# Altium PCB main_pwr.PcbDoc
Units mil, origin at the board's own origin, x right, y up, seen from the top; angles counter-clockwise.
Board outline 1300 x 1300 mil, 2 copper layers (Top Layer, Bottom Layer); 12 components, 7 nets, 48 pads, 13 vias.
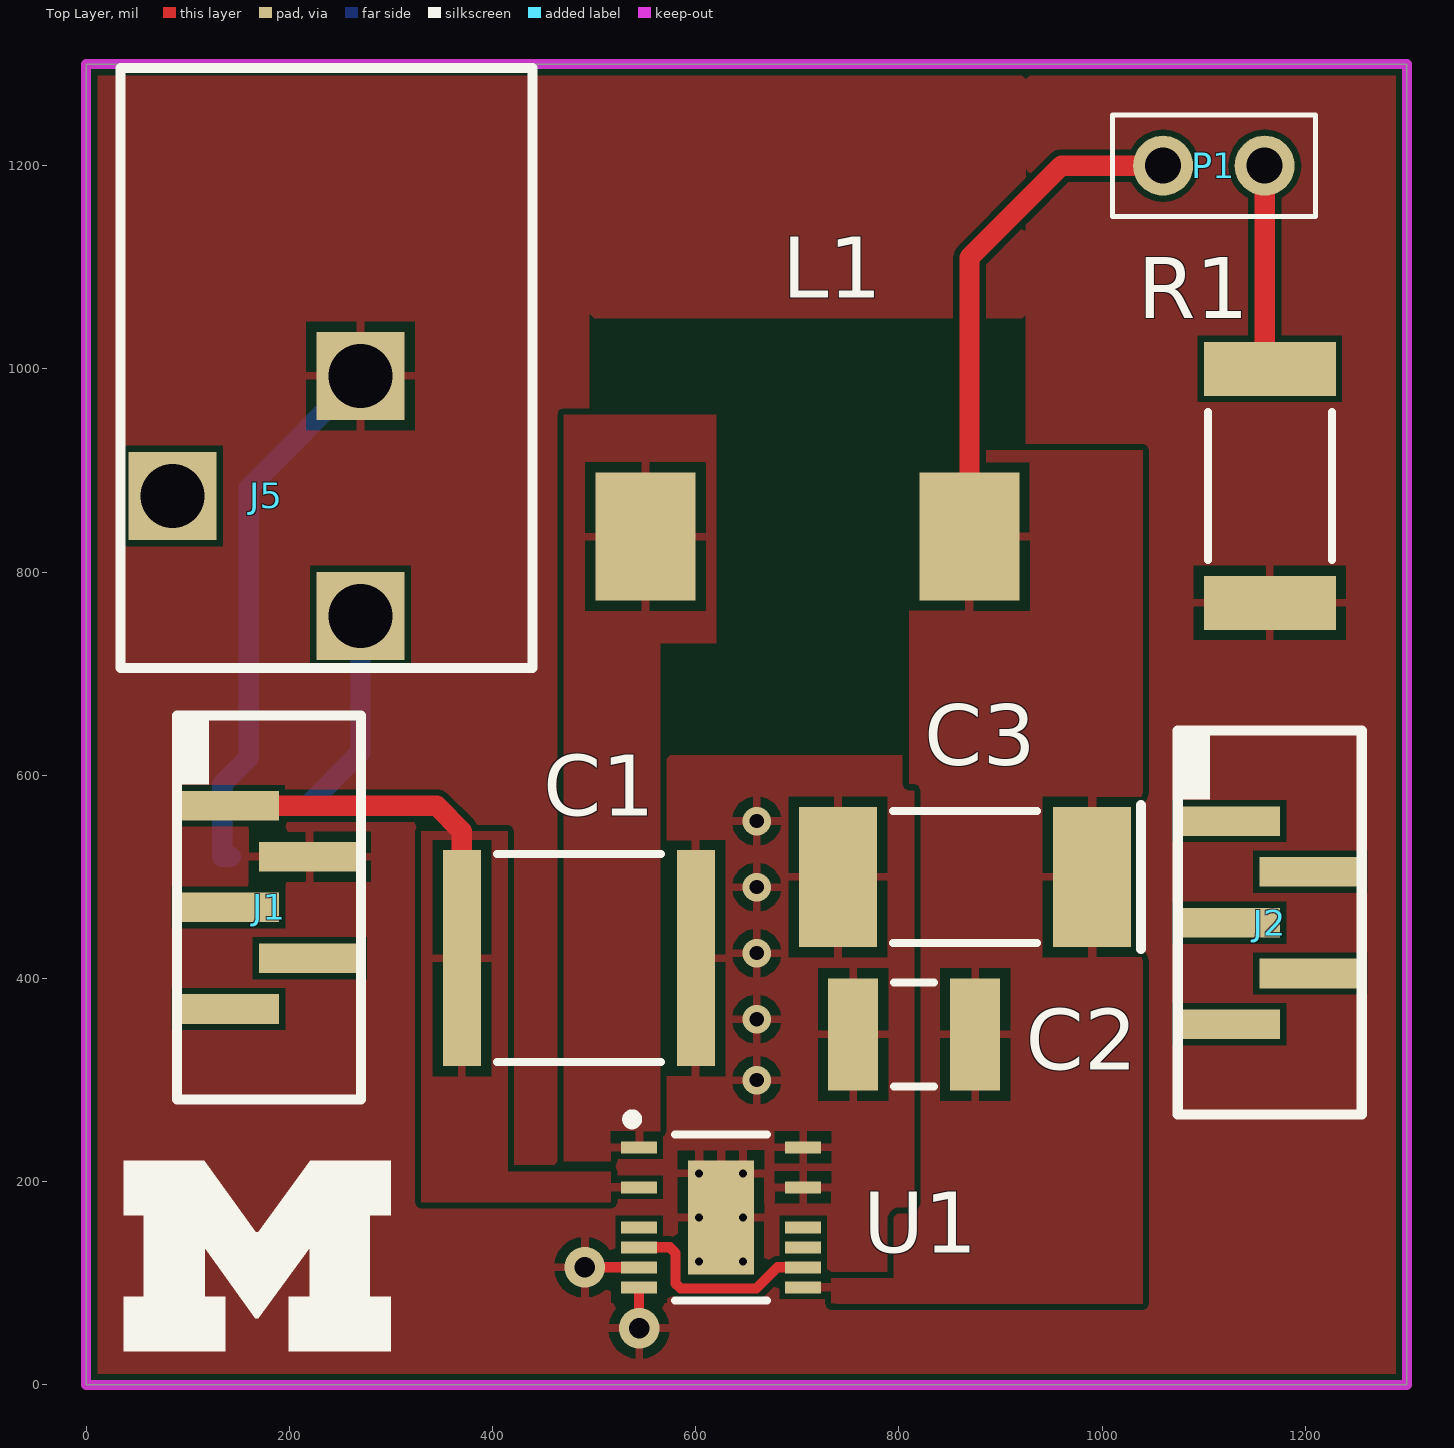
[diagram p0: Top Layer view]
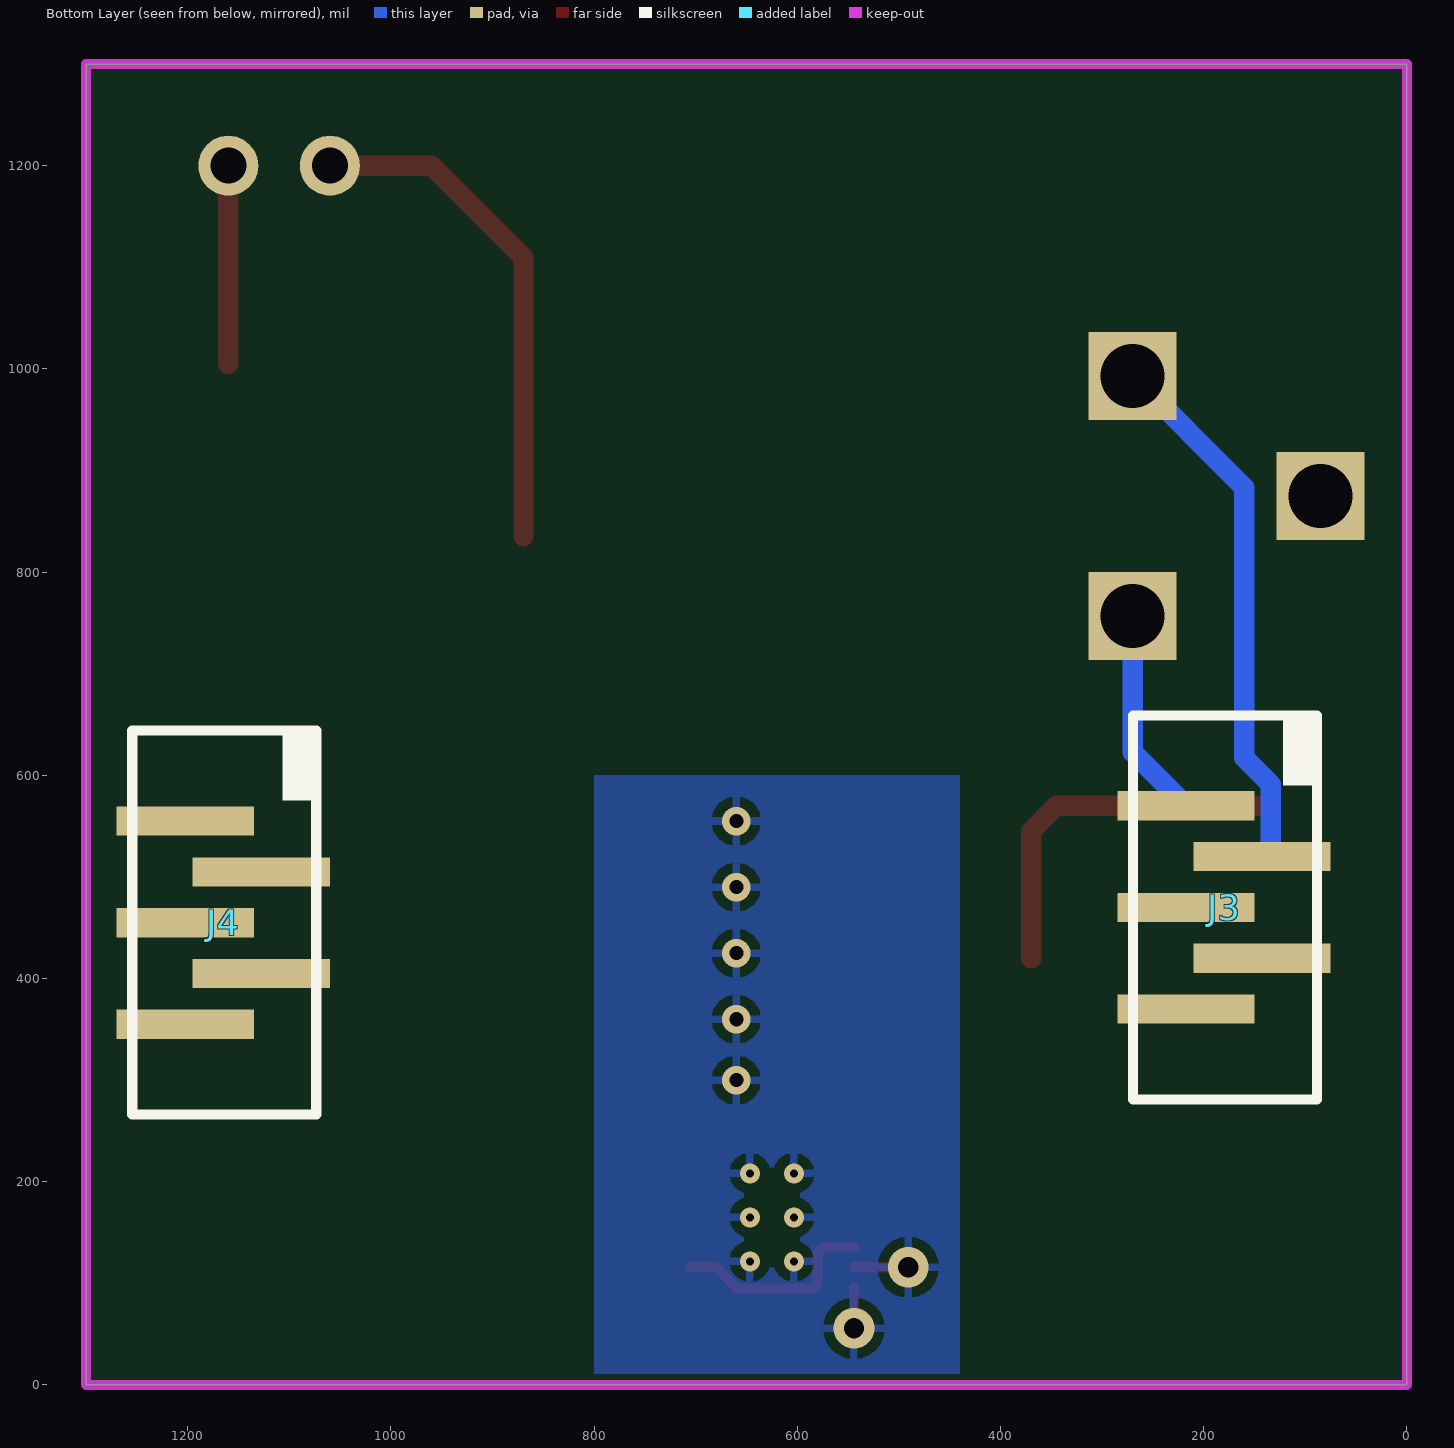
[diagram p1: Bottom Layer view, seen from below]

## Layer stack, top to bottom
Top Solder: solder mask 0.4, Solder Resist, Dk 3.5
Top Layer: signal copper 1.4
Dielectric 1: dielectric 12.6, FR-4, Dk 4.8
Bottom Layer: signal copper 1.4
Bottom Solder: solder mask 0.4, Solder Resist, Dk 3.5

## Board outline
0,0 0,1300 1300,1300 1300,0

## Design rules (kind name [scope] priority, off if disabled: settings)
Clearance "Clearance~Sunstone Circuits" [All] p1: gap=6 // Sunstone Circuits Minimum Clearance Rule (Double Sided)
HoleSize "HoleSize~Sunstone Circuits" [All] p1: absolutevalues=TRUE maxlimit=251 minlimit=16 maxpercent=80.000 minpercent=20.000 // SSC Hole Size Rule For Single Sided & Double Sided Designs.
HoleSize Testpoint [All] p2: absolutevalues=TRUE maxlimit=100 minlimit=1 maxpercent=80.000 minpercent=20.000
HoleSize TestPointUsage [All] p3: absolutevalues=TRUE maxlimit=100 minlimit=1 maxpercent=80.000 minpercent=20.000
MinimumAnnularRing "MinimumAnnularRing~Sunstone Circuits" [All] p1: minimumring=7 // Sunstone Circuits Minimum Annular Ring (Double Sided)
PlaneClearance "PlaneClearance~Sunstone Circuits" [All] p1: clearance=12 // Sunstone Circuits Power Plane Clearance Rule (Double Sided)
PlaneConnect "PlaneConnect~Sunstone Circuits" [All] p1: planeconnectstyle=Relief reliefexpansion=10 reliefentries=4 reliefconductorwidth=8 reliefairgap=10 // Sunstone Circuits Power Plane Connect Rule (Double Sided)
PolygonConnect "PolygonConnect~Sunstone Circuits" [All] p1: connectstyle=Relief reliefconductorwidth=8 reliefentries=4 polygonreliefangle="90 Angle" airgapwidth=10 // Sunstone Circuits Polygon Connect Style (Double Sided)
RoomDefinition main_pwr [InComponentClass('main_pwr')] p1: confinementstyle=ConfineIn formatcopy=TRUE lockcomponents=FALSE outline 18.78,690.71 18.78,1313.65 454.29,1313.65 454.29,1262.5 1222.5,1262.5 1222.5,1047.56 1250.79,1047.56 1250.79,667.76 1282.92,667.76 1282.92,242.24 742.28,242.24 742.28,61.5 507.72,61.5 507.72,257.24 62.08,257.24 62.08,690.71
RoutingVias "RoutingVias~Sunstone Circuits" [All] p1: holewidth=16 width=30 viastyle="Through Hole" minholewidth=16 minwidth=30 maxholewidth=20 maxwidth=40 // Sunstone Circuits Routing Vias Rule (Double Sided)
ShortCircuit "ShortCircuit~Sunstone Circuits" [All] p1: allowed=FALSE // Sunstone Circuits Short Circuit Rule~Do Not Allow (Double Sided)
SolderMaskExpansion "SolderMaskExpansion~Sunstone Circuits" [All] p1: expansion=3 // Sunstone Circuits Solder Mask Expansion Rule (Double Sided)
UnpouredPolygon [All] p1: allowunpoured=FALSE
ViasUnderSMD "ViasUnderSMD~Sunstone Circuits" [All] p1: allowed=FALSE // Sunstone Circuits Vias Under SMD~Do Not Allow (Double Sided)
Width "Width~Sunstone Circuits" [All] p1: maxlimit=100 minlimit=6 preferedwidth=10 // Sunstone Circuits Minimum Width Rule (Double Sided)
25 further rules are at their usual default settings.

## Components (designator, comment, footprint, x,y, rotation, side; value= is the part's Value field where it differs from the comment)
C1 "Ceramic capacitor" 2220 485,420 r0 top
C2 "Ceramic capacitor" 1210 815,345 r180 top
C3 "Ceramic capacitor" 2917 865,500 r180 top
J1 "Samtec connector" TFM-105-02-L-S 180,470 r90 top
J2 "Samtec connector" TFM-105-02-L-S 1165,455 r90 top
J3 "Samtec connector" SFM-105-02-L-S 180,470 r270 bottom
J4 "Samtec connector" SFM-105-02-L-S 1165,455 r270 bottom
J5 "PJ-102AH" PJ-102AH 270,875 r0 top
L1 "L_22uH_SLF10145" SLF10145 710,835 r180 top
P1 "1 x 2 header" "1X2 HEADER" 1110,1200 r0 top
R1 "R_10_2512" 2512 1165,885 r270 top
U1 "LTC3630" MSE16(12) 625,165 r0 top

## Footprints (in the part's own frame and the unit in brackets; to place one, negate y for a bottom-side part, rotate by r counter-clockwise, add the part's x,y. Pads: shape width x height; smd on the part's side, far side on the other; paste and mask are expansions set on the pad)
"1X2 HEADER" [mm] "1x2 header, 100 mils"
  round 1.5 hole 0.9: 1(-1.27,0) 2(1.27,0)
  silkscreen extent -2.54,-1.27 2.54,1.27, body extent -2.53,-1.26 2.53,1.26, height 8.38
1210 [mm] "Chip Capacitor, 2-Leads, Body 3.20x2.50mm, IPC Medium Density"
  rect 1.25x2.8 smd: 1(-1.525,0) 2(1.525,0)
  silkscreen extent -0.5,-1.3 0.5,1.3, body extent -1.8,-1.4 1.8,1.4, height 2.8
2220 [mm] "Chip Capacitor, 2-Leads, Body 5.70x5.00mm, IPC Medium Density"
  rect 0.95x5.4 smd: 1(-2.925,0) 2(2.925,0)
  silkscreen extent -2.05,-2.6 2.05,2.6, body extent -3.05,-2.7 3.05,2.7, height 2.5
2512 [mm] "Chip Capacitor, 2-Leads, Body 6.30x3.10mm, IPC Medium Density"
  rect 1.35x3.3 smd: 1(-2.925,0) 2(2.925,0)
  silkscreen extent -1.85,-1.55 1.85,1.55, body extent -3.25,-1.65 3.25,1.65, height 0.8
2917 [mm] "Chip Capacitor, 2-Leads, Body 7.30x3.20mm, IPC Medium Density"
  rect 1.95x3.5 smd: 1(-3.175,0) 2(3.175,0)
  silkscreen extent -4.4,-1.8 1.8,1.8, body extent -3.8,-1.75 3.8,1.75, height 3.1
MSE16(12) [mm] "TSSOP, 16-Leads, Body 4.04x3.00mm, Pitch 0.50mm, Thermal Pad 2.95x1.75mm, IPC Medium Density"
  rect 0.9x0.3 smd: 1(-2.05,1.75) 3(-2.05,0.75) 5(-2.05,-0.25) 6(-2.05,-0.75) 7(-2.05,-1.25) 8(-2.05,-1.75) 9(2.05,-1.75) 10(2.05,-1.25) 11(2.05,-0.75) 12(2.05,-0.25) 14(2.05,0.75) 16(2.05,1.75)
  rect 1.65x2.85 smd: 17(0,0)
  silkscreen extent -2.35,-2.08 1.15,2.57, body extent -1.55,-2.05 1.55,2.05, height 1.1
PJ-102AH [mm] "Power Jack"
  rect 2.2x2.2 hole 1.6: 1(0,-3) 2(0,3) 3(-4.7,0)
  silkscreen extent -6,-4.3 4.3,10.7, body extent -5.75,-3.99 4.08,10.89, height 10
SFM-105-02-L-S [mm] "Samtec TFM, single row, 5 pos"
  rect 0.73x3.43 smd: 1(-2.54,-0.95) 2(-1.27,0.95) 3(0,-0.95) 4(1.27,0.95) 5(2.54,-0.95)
  silkscreen extent -4.8,-2.27 4.8,2.33, body extent -5.15,-0.9 5.15,1.53, height 4.57
SLF10145 [mm] "TDK chip inductors"
  rect 2.5x3.2 smd: 1(-4.05,0) 2(4.05,0)
  body extent -5.1,-5.1 5.1,5.1, height 4.5
TFM-105-02-L-S [mm] "Samtec TFM, single row, 5 pos"
  rect 0.74x2.54 smd: 1(2.54,1.015) 2(1.27,-1.015) 3(0,1.015) 4(-1.27,-1.015) 5(-2.54,1.015)
  silkscreen extent -4.8,-2.3 4.83,2.35, body extent -4.8,-2.3 4.8,2.3, height 5.59

## Part data
C1: library part C_4.7u_2220_ceramic, "Ceramic capacitor, 4.7u, 2220 package"
C2: library part C_100u_1210_ceramic, "Ceramic capacitor, 100u, 1210 package"
C3: library part C_100u_2917_tantalum, "Tantalum capacitor, 100u, 2917 package"
J1 J2 J3 J4: library part "Samtec conntector", "Samtec connector, 1.27 mm, single row, 5 pos SMD"
J5: "CONN PWR JACK 2.1X5.5MM HIGH CUR"
L1: "Inductor, 22 uH, TDK SLF10145"
P1: "100 mils standard header"
R1: "Resistor, 10 ohm, 2512 package"
U1: "High Efficiency, 65V 500mA synchronous Step-Down Converter"

## Via types
v1: diameter 19.68, hole 7.87, Top Layer to Bottom Layer, 6 vias
v2: diameter 28, hole 14, Top Layer to Bottom Layer, 5 vias
v3: diameter 40, hole 20, Top Layer to Bottom Layer, 2 vias

## Nets (pads, with @x,y where several pads share a name; then routed paths per layer and width w, separated by ;. In a path a pad name is that pad's centre, name@x,y a point inside that pad or via, vN(x,y) a via of type N, cw(c..) or ccw(c..) an arc to the next point about the centre after c; other vN are vias at no path point)
GND: C1.2 C2.2 C3.2 J1.2 J3.2 J5.2 R1.2 U1.7 U1.8 U1.14 U1.16 U1.17 | length 632.1
  Top Layer w10: v3(490.79,115.79) U1.7 ; v3(544.29,55.71) U1.8
  Bottom Layer w20: J3.2 133.88,520 133.88,591 160,617.12 160,883.11 J5.2
  other v1: 603.35,121.69 646.65,121.69 603.35,165 646.65,165 603.35,208.31 646.65,208.31
  other v2: 660,300 660,360 660,425 660,490 660,555
NetJ3_1: J3.1 J5.1 | length 208.7
  Bottom Layer w20: J3.1 270,622.6 J5.1
NetL1_2: L1.2 U1.1
NetP1_2: P1.2 R1.1 | length 194.8
  Top Layer w20: R1.1@1160,1005.16 P1.2
NetU1_6: U1.6 U1.10 | length 204.4
  Top Layer w10: U1.6 574.53,135.47 580,130 580,100 585,95 659.77,95 680.56,115.79 U1.10
VCC3.3: C2.1 C3.1 L1.1 P1.1 U1.9 | length 502.5
  Top Layer w20: L1.1 869.45,1109.45 960,1200 P1.1
VIN: C1.1 J1.1 U1.3 | length 365.3
  Top Layer w20: J1.1 345,570 369.84,545.16 C1.1
pads on no net: J1.3 J1.4 J1.5 J2.1 J2.2 J2.3 J2.4 J2.5 J3.3 J3.4 J3.5 J4.1 J4.2 J4.3 J4.4 J4.5 J5.3 U1.5 U1.11 U1.12

## Polygon pours and split planes (outlines as drawn)
VCC3.3 on Top Layer "Top Layer-No Net" (solid, pour order 13): 685,105 795,105 795,415 810,415 810,920 1040,920 1040,405 1040,80 685,80
GND on Top Layer "Top Layer-No Net" (solid, pour order 11): 580,220 580,585 815,585 815,175 670,175 670,80 580,80
VIN on Top Layer "Top Layer-No Net" (solid, pour order 9): 330,545 330,180 575,180 575,210 415,210 415,545
NetL1_2 on Top Layer "Top Layer-No Net" (solid, pour order 5): 565,220 565,730 620,730 620,955 470,955 470,220
GND on Top Layer "Top Layer-No Net" (solid, pour order 10): 0,0 1300,0 1300,1300 925,1300 925,620 495,620 495,1055 500,1050 925,1050 925,1295 920,1300 0,1300
GND on Bottom Layer "Top Layer-No Net" (solid, pour order 12): 440,600 440,0 800,0 800,560 800,600

## Keep-outs
Keep-Out Layer:
  the board outline again, w10

## Silkscreen, mask and mechanical layers (free items; w line width, h text height)
Top Overlay:
  region: 37.05,33.36 136.99,33.36 136.99,86.72 116.67,86.72 116.67,135 166.22,65.55 169.6,65.55 220,135 220,86.72 199.67,86.72 199.67,33.36 299.62,33.36 299.62,86.72 279.29,86.72 279.29,167.19 299.62,167.19 299.62,220.55 220.42,220.55 169.6,150.25 167.06,150.25 116.24,220.55 37.05,220.55 37.05,167.19 56.53,167.19 56.53,86.72 37.05,86.72